# EAGLE board timetracker-1-7 (EAGLE 7.5.0)
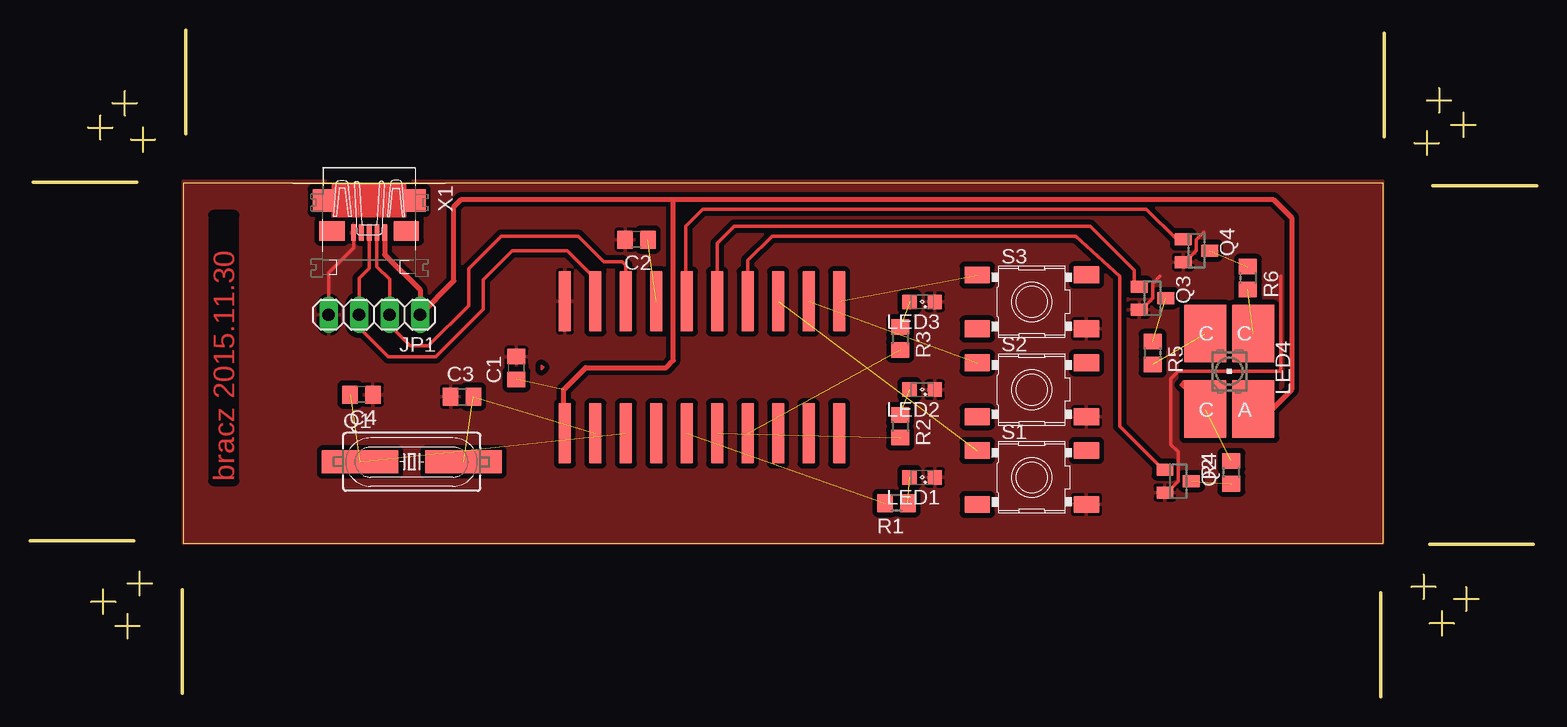
[diagram p0: board, top side]

Size 125.55 x 55.55 mm. Coordinates in mm from the lower left corner, seen from the top.
Outline: 8.91,42.85 0.28,42.85
Outline: 12.98,55.55 12.98,46.91
Outline: 4.85,47.42 6.88,47.42
Outline: 5.86,46.4 5.86,48.44
Outline: 6.88,49.45 8.91,49.45
Outline: 7.9,48.44 7.9,50.47
Outline: 8.4,46.4 10.44,46.4
Outline: 9.42,45.39 9.42,47.42
Outline: 112.85,46.63 112.85,55.27
Outline: 125.55,42.57 116.91,42.57
Outline: 117.42,50.7 117.42,48.67
Outline: 116.4,49.68 118.44,49.68
Outline: 119.45,48.67 119.45,46.63
Outline: 118.44,47.65 120.47,47.65
Outline: 116.4,47.14 116.4,45.11
Outline: 115.39,46.13 117.42,46.13
Outline: 12.7,8.91 12.7,0.28
Outline: 0,12.98 8.64,12.98
Outline: 8.13,4.85 8.13,6.88
Outline: 9.14,5.86 7.11,5.86
Outline: 6.1,6.88 6.1,8.91
Outline: 7.11,7.9 5.08,7.9
Outline: 9.14,8.4 9.14,10.44
Outline: 10.16,9.42 8.13,9.42
Outline: 116.63,12.7 125.27,12.7
Outline: 112.57,0 112.57,8.64
Outline: 120.7,8.13 118.67,8.13
Outline: 119.68,9.14 119.68,7.11
Outline: 118.67,6.1 116.63,6.1
Outline: 117.65,7.11 117.65,5.08
Outline: 117.14,9.14 115.11,9.14
Outline: 116.13,10.16 116.13,8.13
Outline: 12.77,12.77 112.77,12.77 112.77,42.77 12.77,42.77 12.77,12.77
Copper layers (1*16): Top 0.035mm / dielectric 1.5mm / Bottom 0.035mm
Design rules "default *": minimum track width 10mil, minimum drill 24mil, track to track 12mil, track to pad 12mil, pad to pad 8mil, via to via 8mil, smd to smd 8mil, copper to edge 0mil, drill to drill 8mil, minimum pad ring 10mil, minimum via ring 8mil, stop-mask expansion 4mil, vias tented up to drill 0mil, thermal gap 10mil
Net classes: 0 default: width 0.305 mm

## Footprints (pad centres in the part's own frame; a part is rotated, then mirrored left to right if it is on the bottom)
C0805 = smd 1.3 x 1.5: 1 -0.95,0; 2 0.95,0
1X04 = drill 1.016 long: 1 -3.81,0; 2 -1.27,0; 3 1.27,0; 4 3.81,0
SML0805 = smd 1.2 x 1.2: A 1.05,0; C -1.05,0
P-LCC-4 = smd 3.5 x 4.8: A -2,3.15; C@1 2,3.15; C@3 -2,-3.15; C@4 2,-3.15
HC49UP = smd 6.35 x 1.93: 1 -4.318,0; 2 4.318,0
SOT23 = smd 1 x 1.4: 1 -0.95,-1.1; 2 0.95,-1.1; 3 0,1.1
R0805 = smd 1.3 x 1.5: 1 -0.95,0; 2 0.95,0
TACTSW-6X6 = smd 2.1 x 1.4: 1 -4.55,2.24; 2 4.55,2.25; 3 -4.55,-2.25; 4 4.55,-2.25
DIL20-SMD = smd 1 x 5: 1 -11.43,-5.5; 2 -8.89,-5.5; 3 -6.35,-5.5; 4 -3.81,-5.5; 5 -1.27,-5.5; 6 1.27,-5.5; 7 3.81,-5.5; 8 6.35,-5.5; 9 8.89,-5.5; 10 11.43,-5.5; 11 11.43,5.5; 12 8.89,5.5; 13 6.35,5.5; 14 3.81,5.5; 15 1.27,5.5; 16 -1.27,5.5; 17 -3.81,5.5; 18 -6.35,5.5; 19 -8.89,5.5; 20 -11.43,5.5
MICRO-B-PAC = smd 1.35 x 0.4: 1 2.675,1.3; 2 2.675,0.65; 3 2.675,0; 4 2.675,-0.65; 5 2.675,-1.3 | smd 1.9 x 1.8: M1 0,-3.8; M2 0,3.8 | smd 1.6 x 2.1: M3 2.55,3.1; M4 2.55,-3.1

## Placement (x,y rotation side)
C1  1 uF  [C0805]  40.54,27.38 90 top
C2  470 nF  [C0805]  50.54,38.08 180 top
C3  18 pF  [C0805]  36,24.99 0 top
C4  18 pF  [C0805]  27.63,25.17 180 top
JP1  [1X04]  28.69,31.82 180 top
LED1  [SML0805]  74.34,18.26 180 top
LED2  [SML0805]  74.34,25.58 180 top
LED3  [SML0805]  74.34,32.89 180 top
LED4  [P-LCC-4]  99.95,27.1 180 top
Q1  [HC49UP]  31.81,19.56 0 top
Q2  BSS123  [SOT23]  95.68,17.96 270 top
Q3  BSS123  [SOT23]  93.55,33.2 270 top
Q4  BSS123  [SOT23]  97.2,37.16 270 top
R1  [R0805]  72.21,16.13 180 top
R2  [R0805]  72.51,22.53 270 top
R3  [R0805]  72.51,29.84 270 top
R4  [R0805]  100.12,18.69 90 top
R5  [R0805]  93.55,28.62 270 top
R6  [R0805]  101.5,34.88 270 top
S1  TACTSW-6X6S  [TACTSW-6X6]  83.49,18.26 0 top
S2  TACTSW-6X6S  [TACTSW-6X6]  83.49,25.58 0 top
S3  TACTSW-6X6S  [TACTSW-6X6]  83.49,32.89 0 top
U$1  PIC18F14K50SMD  [DIL20-SMD]  56,27.43 0 top
X1  MICRO-USB-B  [MICRO-B-PAC]  28.26,41.34 270 top

## Library data of the parts
C1-C4 R1-R6 = rcl
JP1 = pinhead
LED1-LED3 = led
LED4 S1-S3 X1 = g-e2e-training
Q1 = g-e2e-training; OC_FARNELL: unknown; OC_NEWARK: unknown
Q2-Q4 = transistor-small-signal
U$1 = pic18f14k50

## Nets
+5V: C1.1 JP1.1 LED4.A U$1.1 X1.1
GND: C1.2 C2.2 C3.1 C4.1 JP1.4 LED1.C LED2.C LED3.C Q2.2 Q3.2 Q4.2 S1.4 S2.4 S3.4 U$1.20 X1.5
N$1: JP1.3 U$1.19 X1.3
N$2: C3.2 Q1.2 U$1.2
N$3: C2.1 U$1.17
N$4: C4.2 Q1.1 U$1.3
N$5: JP1.2 U$1.18 X1.2
N$6: R3.2 U$1.7
N$7: R2.2 U$1.6
N$8: R1.2 U$1.5
N$9: LED1.A R1.1
N$10: LED2.A R2.1
N$11: LED3.A R3.1
N$12: LED4.C@1 R4.2
N$13: LED4.C@4 R5.2
N$14: S1.1 U$1.13
N$15: S2.1 U$1.12
N$16: LED4.C@3 R6.2
N$17: Q2.3 R4.1
N$18: Q3.3 R5.1
N$19: Q4.3 R6.1
N$20: Q4.1 U$1.16
N$21: Q3.1 U$1.15
N$22: Q2.1 U$1.14
N$23: S3.1 U$1.11

## Tracks (layer width: path | path; a pad name or v marks a point on that pad's centre or on a via)
+5V  (1 unrouted)
  Top 0.406: X1.1 29.56,36.83 32.5,33.89 JP1.1 35.33,34.65 35.33,40.82 35.94,41.42 53.62,41.42 | 53.62,41.42 103.6,41.42 105.13,39.9 105.13,25.58 103.54,23.99 LED4.A | U$1.1 44.47,22.03 44.47,25.58 46.3,27.4 53.01,27.4 53.62,28.01 53.62,41.42
GND
  Top 0.305: X1.5 26.96,37.4 24.88,35.32 JP1.4 | Q4.2 96.25,36.21 97.2,37.16 97.2,38.07 97.81,38.68 | Q3.2 92.6,32.25 93.55,33.2 93.55,34.41 94.16,35.02 | Q2.2 94.73,17.01 95.68,17.96 95.68,20.39 95.07,21 95.07,26.49 95.68,27.1 104.21,27.1 104.21,35.02
  pour Top (isolate 0.406): 12.77,42.64 12.77,12.77 112.75,12.77 112.75,42.95 12.77,42.95
N$1
  Top 0.305: X1.3 28.26,35.7 27.42,34.86 JP1.3 27.4,31.8 27.4,30.76 29.84,28.32 33.8,28.32 37.77,32.28 37.77,34.72 40.21,37.16 44.78,37.16 47.11,34.83 U$1.19
N$2  (2 unrouted)
N$3  (1 unrouted)
N$4  (2 unrouted)
N$5
  Top 0.305: X1.2 28.91,35.81 29.96,34.76 JP1.2 29.96,30.94 31.67,29.23 33.2,29.23 36.55,32.59 36.55,35.63 39.29,38.38 45.69,38.38 47.83,36.24 49.35,36.24 49.65,35.94 U$1.18
N$6  (1 unrouted)
N$7  (1 unrouted)
N$8  (1 unrouted)
N$9  (1 unrouted)
N$10  (1 unrouted)
N$11  (1 unrouted)
N$12  (1 unrouted)
N$13  (1 unrouted)
N$14  (1 unrouted)
N$15  (1 unrouted)
N$16  (1 unrouted)
N$17  (1 unrouted)
N$18  (1 unrouted)
N$19  (1 unrouted)
N$20
  Top 0.305: U$1.16 54.63,33.03 54.63,39.19 56.06,40.61 93.04,40.61 95.54,38.11 Q4.1
N$21
  Top 0.305: Q3.1 92.02,34.57 92.02,35.53 88.36,39.19 58.7,39.19 57.27,37.76 U$1.15
N$22
  Top 0.305: Q2.1 94.42,18.91 90.8,22.53 90.8,35.02 87.14,38.38 61.85,38.38 59.81,36.34 U$1.14
N$23  (1 unrouted)

## Text on the board
Top: bracz 2015.11.30